# EAGLE board NyanTimer-v7 (EAGLE 9.4.2)
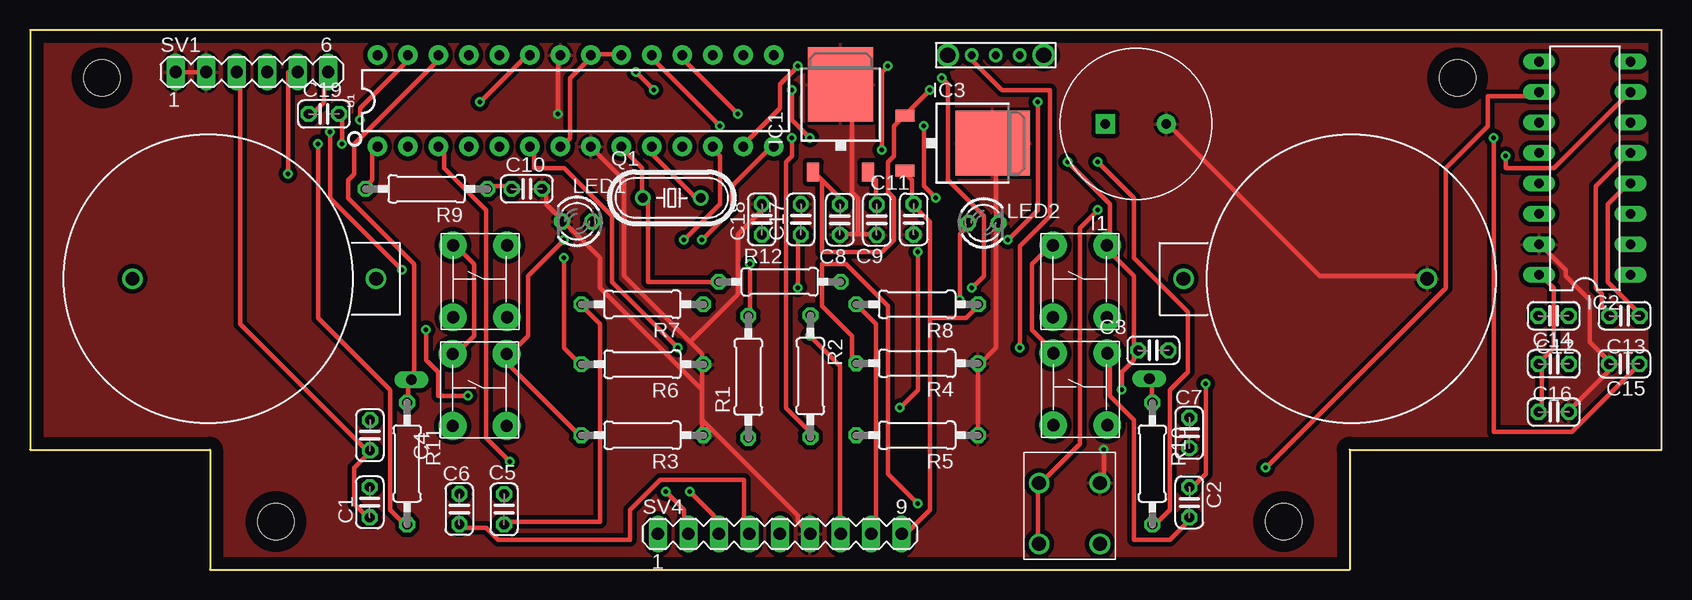
[diagram p0: board, top side]
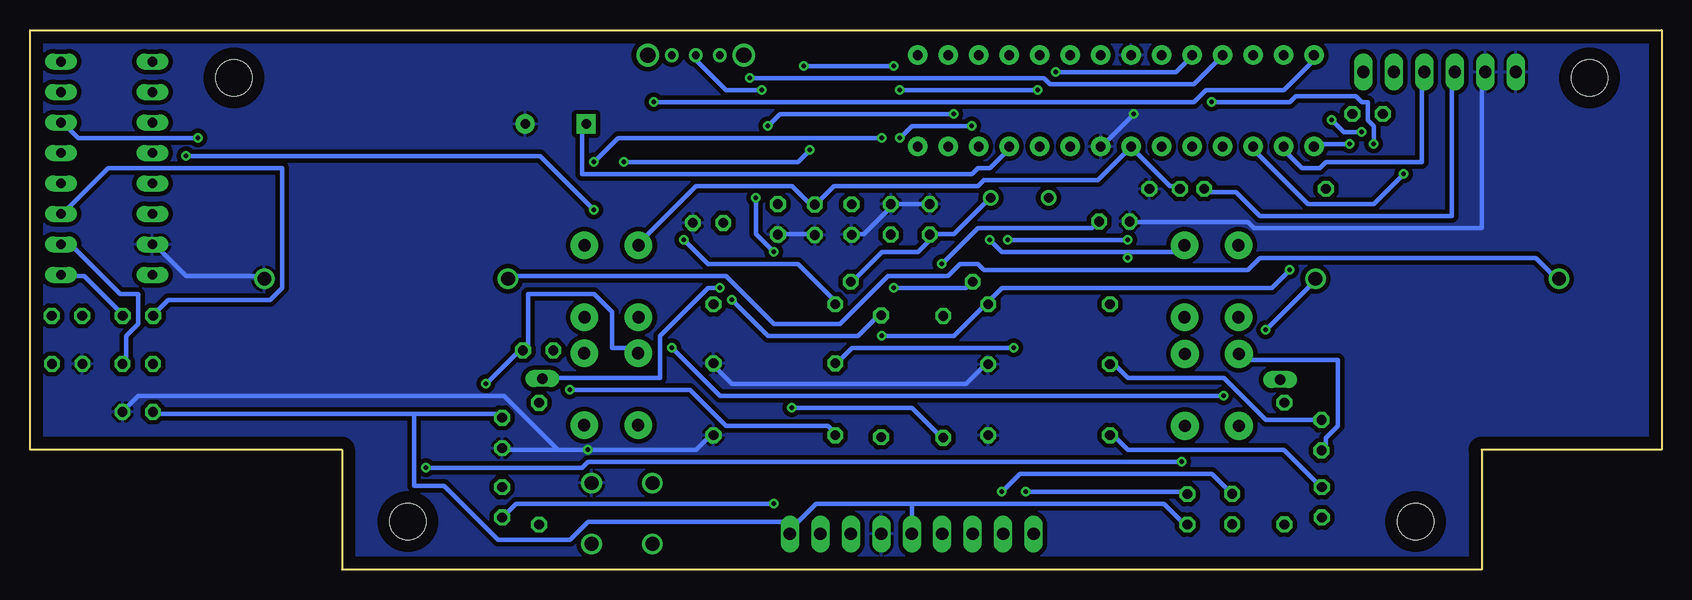
[diagram p1: board, bottom side, seen from below]

Size 136 x 45 mm. Coordinates in mm from the lower left corner, seen from the top.
Outline: 136,10 136,45 0,45 0,10 15,10 15,0 110,0 110,10 136,10
Copper layers (1*16): Top 0.035mm / dielectric 1.5mm / Bottom 0.035mm
Design rules "default": minimum track width 6mil, minimum drill 0.35mm, track to track 6mil, track to pad 6mil, pad to pad 6mil, via to via 6mil, smd to smd 6mil, copper to edge 40mil, drill to drill 6mil, minimum pad ring 10mil, minimum via ring 8mil, stop-mask expansion 4mil, vias tented up to drill 0mil, thermal gap 10mil
Net classes: 0 default: width 0.381 mm, clearance 0.381 mm
Holes 3 mm at 20.5,4 6,41 104.5,4 119,41

## Footprints (pad centres in the part's own frame; a part is rotated, then mirrored left to right if it is on the bottom)
AKIZUKI_CR2032 = drill 1.143: MINUS 0,20.32; PLUS 0,0
C025-024X044 = drill 0.813 octagon: 1 -1.27,0; 2 1.27,0
TACT_SWITCH = drill 1.016 pad 2.3: 1 0,0; 2 4.5,0; 3 0,6; 4 4.5,6
PKM13EPYH4000 = drill 0.8 pad 1.6 square: 1 0,0 | drill 0.8 pad 1.6: 2 5.08,0
TO252 = smd 1 x 1.6: 1 -2.28,-4.8; 2 2.28,-4.8 | smd 5.4 x 6.2: 3 0,2.5
DIL16 = drill 0.813 long: 1 -8.89,-3.81; 2 -6.35,-3.81; 3 -3.81,-3.81; 4 -1.27,-3.81; 5 1.27,-3.81; 6 3.81,-3.81; 7 6.35,-3.81; 8 8.89,-3.81; 9 8.89,3.81; 10 6.35,3.81; 11 3.81,3.81; 12 1.27,3.81; 13 -1.27,3.81; 14 -3.81,3.81; 15 -6.35,3.81; 16 -8.89,3.81
LED3MM = drill 0.813 octagon: A -1.27,0; K 1.27,0
PHONE = drill 1.143: GND 0,-5.08; PIN1 5.08,-5.08; PIN2 0,0; PIN3 5.08,0
1PINHEAD = drill 0.9 long: P$1 0,0
HC49/S = drill 0.813: 1 -2.413,0; 2 2.413,0
0207/10 = drill 0.813 octagon: 1 -5.08,0; 2 5.08,0
MA06-1 = drill 1.016 long: 1 -6.35,0; 2 -3.81,0; 3 -1.27,0; 4 1.27,0; 5 3.81,0; 6 6.35,0
MA09-1 = drill 1.016 long: 1 -10.16,0; 2 -7.62,0; 3 -5.08,0; 4 -2.54,0; 5 0,0; 6 2.54,0; 7 5.08,0; 8 7.62,0; 9 10.16,0
AKIZUKI_SWITCH = drill 0.65: PIN1 2,0; PIN2 4,0; PIN3 6,0 | drill 1.27: SIDE1 0,0; SIDE2 8,0
DIP28 = drill 0.813 pad 1.626: 1 -16.51,-3.81; 2 -13.97,-3.81; 3 -11.43,-3.81; 4 -8.89,-3.81; 5 -6.35,-3.81; 6 -3.81,-3.81; 7 -1.27,-3.81; 8 1.27,-3.81; 9 3.81,-3.81; 10 6.35,-3.81; 11 8.89,-3.81; 12 11.43,-3.81; 13 13.97,-3.81; 14 16.51,-3.81; 15 16.51,3.81; 16 13.97,3.81; 17 11.43,3.81; 18 8.89,3.81; 19 6.35,3.81; 20 3.81,3.81; 21 1.27,3.81; 22 -1.27,3.81; 23 -3.81,3.81; 24 -6.35,3.81; 25 -8.89,3.81; 26 -11.43,3.81; 27 -13.97,3.81; 28 -16.51,3.81

## Placement (x,y rotation side)
BT1  AKIZUKI_CR2032  [AKIZUKI_CR2032]  28.85,24.25 90 top
BT2  AKIZUKI_CR2032  [AKIZUKI_CR2032]  96.15,24.25 270 top
C1  0.1u  [C025-024X044]  28.32,5.61 90 top
C2  0.1u  [C025-024X044]  96.64,5.61 270 top
C3  0.1u  [C025-024X044]  93.64,18.28 180 top
C4  0.1u  [C025-024X044]  28.34,11.2 90 top
C5  1u  [C025-024X044]  39.52,5.02 90 top
C6  1u  [C025-024X044]  35.79,5.04 90 top
C7  0.1u  [C025-024X044]  96.64,11.39 90 top
C8  0.1u  [C025-024X044]  67.51,29.19 270 top
C9  2.2u  [C025-024X044]  70.58,29.17 270 top
C10  0.1u  [C025-024X044]  41.41,31.75 0 top
C11  2.2u  [C025-024X044]  73.66,29.21 270 top
C12  0.1u  [C025-024X044]  127,21.16 180 top
C13  0.1u  [C025-024X044]  132.92,21.16 180 top
C14  0.1u  [C025-024X044]  127.02,17.15 0 top
C15  0.1u  [C025-024X044]  132.9,17.15 180 top
C16  0.1u  [C025-024X044]  127.02,13.14 0 top
C17  22p  [C025-024X044]  64.25,29.2 90 top
C18  22p  [C025-024X044]  61,29.2 90 top
C19  0.1u  [C025-024X044]  24.5,38 0 top
CONNECTOR1  TACT_SWITCH  [TACT_SWITCH]  35.23,11.98 0 top
CONNECTOR2  TACT_SWITCH  [TACT_SWITCH]  85.3,12.04 0 top
CONNECTOR3  TACT_SWITCH  [TACT_SWITCH]  85.28,21.04 0 top
CONNECTOR4  TACT_SWITCH  [TACT_SWITCH]  35.26,21.04 0 top
I1  P-04118_PKM13EPYH4000  [PKM13EPYH4000]  89.64,37.16 0 top
IC1  7815DT  [TO252]  67.57,37.95 0 top
IC2  MAX232  [DIL16]  129.61,33.47 90 top
IC3  7815DT  [TO252]  77.74,35.56 270 top
LED1  [LED3MM]  45.6,29.03 180 top
LED2  [LED3MM]  79.48,28.91 0 top
PHN1  PHONE  [PHONE]  89.19,2.14 180 top
PIN1  1PINHEAD  [1PINHEAD]  31.8,15.84 0 top
PIN2  1PINHEAD  [1PINHEAD]  93.3,15.92 0 top
Q1  [HC49/S]  53.5,31 0 top
R1  220  [0207/10]  59.88,16.07 90 top
R2  220  [0207/10]  65.05,16.12 90 top
R3  10k  [0207/10]  51.05,11.2 180 top
R4  10k  [0207/10]  73.95,17.2 180 top
R5  10k  [0207/10]  73.95,11.2 180 top
R6  10k  [0207/10]  51.05,17.12 180 top
R7  10k  [0207/10]  51.05,22.12 0 top
R8  10k  [0207/10]  73.95,22.12 180 top
R9  10k  [0207/10]  33.05,31.75 180 top
R10  10M  [0207/10]  93.56,8.83 270 top
R11  10M  [0207/10]  31.44,8.84 270 top
R12  1M  [0207/10]  62.5,24 0 top
SV1  [MA06-1]  18.5,41.5 0 top
SV4  [MA09-1]  62.5,2.97 0 top
SW1  AKIZUKI_SWITCH  [AKIZUKI_SWITCH]  76.5,42.9 0 top
U1  328P  [DIP28]  45.48,39.09 0 top

## Library data of the parts
BT1 BT2 = akizuki_cr2032
C1-C19 = rcl; SPICEPREFIX: C
CONNECTOR1-CONNECTOR4 = akizuki_tact_switch
I1 = Akizuki
IC1 IC3 = linear
IC2 = maxim; MF: MAXIM; MPN: MAX232ACPE+; OC_FARNELL: 9723773; OC_NEWARK: 68K4544
LED1 LED2 = led
PHN1 = akizuki_phone_jack
PIN1 PIN2 = 1pinhead
Q1 = crystal; OC_FARNELL: 1667008; OC_NEWARK: unknown
R1-R12 = resistor
SV1 SV4 = con-lstb; OC_FARNELL: unknown; OC_NEWARK: unknown
SW1 = akizuki_switch
U1 = SparkFun-IC-Microcontroller; PROD_ID: IC-09136

## Nets
+5V: C1.1 C2.1 C3.1 C4.1 C9.1 C10.1 CONNECTOR1.3 CONNECTOR2.3 CONNECTOR3.3 CONNECTOR4.3 IC1.2 R9.1 SV1.3 U1.7 U1.20 U1.21
BUZ+: I1.1 U1.11
GND: BT2.MINUS C7.1 C8.2 C9.2 C10.2 C11.2 C15.2 C16.2 C17.2 C18.2 I1.2 IC1.3 IC2.15 IC3.3 LED1.K LED2.K PHN1.GND R3.1 R4.1 R5.1 R6.1 SV1.1 SV1.2 SV4.6 U1.8 U1.22
LEDG: R2.1 U1.19
LEDR: R1.1 U1.18
N$1: LED1.A R1.2
N$2: LED2.A R2.2
N$3: C5.2 SV4.2
N$4: C6.1 SV4.4
N$5: C6.2 SV4.3
N$6: C19.1 SV1.6
N$7: BT1.MINUS BT2.PLUS
N$9: C12.2 IC2.3
N$10: C12.1 IC2.1
N$11: C13.1 IC2.4
N$12: C13.2 IC2.5
N$13: C14.2 IC2.2
N$14: C15.1 IC2.6
PADL: PIN1.P$1 R11.1 U1.26
PADLIN: R11.2 U1.23
PADR: PIN2.P$1 R10.1 U1.25
PADRIN: R10.2 U1.24
PHONE: IC2.7 PHN1.PIN1 PHN1.PIN3
RESET: C19.2 R9.2 U1.1
RX: SV1.4 U1.2
S1: C17.1 Q1.1 R12.1 U1.9
S3: C18.1 Q1.2 R12.2 U1.10
SCL: R8.2 SV4.8 U1.28
SDA: R7.2 SV4.7 U1.27
SW1: C1.2 CONNECTOR1.4 R3.2 U1.12
SW2: C2.2 CONNECTOR2.4 R4.2 U1.6
SW3: C3.2 CONNECTOR3.4 R5.2 U1.13
SW4: C4.2 CONNECTOR4.4 R6.2 U1.14
T2IN: IC2.10 SV1.5 U1.3
VCC: C5.1 C7.2 C11.1 C14.1 C16.1 IC2.16 IC3.2 R7.1 R8.1 SV4.5 SV4.9
VSW: BT1.PLUS SW1.PIN1
VSWOUT: C8.1 IC1.1 IC3.1 SW1.PIN2

## Tracks (layer width: path | path; a pad name or v marks a point on that pad's centre or on a via)
+5V  (via drill 0.35)
  Top 0.381: IC1.2 70.5,32.5 70.5,30.5 C9.1 | v98,15.5 98,8 97,7 C2.1 | CONNECTOR3.3 85,27 83.5,25.5 83.5,20 85,18.5 CONNECTOR2.3 | C1.1 28,4.5 27,5.5 27,8.5 28,9.5 C4.1 28,10 17.5,20.5 17.5,41.5 SV1.3 | CONNECTOR4.3 35.5,27 37,25.5 37,19.5 35.5,18 CONNECTOR1.3 | U1.20 49,43 47,43 U1.21 46.5,42.5 45,41 45,36 44.5,35.5 U1.7 | R9.1 38.5,32 40,32 C10.1
  Bottom 0.381: CONNECTOR3.3 85,27.5 80.5,32 72.5,32 71,30.5 C9.1 70.5,30.5 69,32 57,32 56.5,32.5 47,32.5 44.5,35 U1.7 44,35 41,32 40.5,32 C10.1 | CONNECTOR2.3 85.5,18.5 87.5,18.5 87.5,21.5 89,23 94.5,23 94.5,18.5 C3.1 95,18 95.5,18 v98,15.5 | C4.1 28,10 28,11 27,12 27,17.5 35,17.5 CONNECTOR1.3 | SV1.3 17.5,41.5 17.5,29.5 33.5,29.5 35.5,31.5 38,31.5 R9.1
BUZ+
  Bottom 0.381: I1.1 90,37 90,33 57.5,33 57,33.5 56,33.5 54.5,35 U1.11
GND  (via drill 0.35)
  Top 0.381: C16.2 128.5,13.5 131.5,16.5 131.5,17 C15.2 131.5,17.5 130,19 130,22.5 128,24.5 128,25 126,27 IC2.15 | I1.2 95,37 107.5,24.5 116,24.5 BT2.MINUS | IC3.3 80.5,35.5 80.5,29 LED2.K 80.5,28.5 80.5,18.5 79.5,17.5 R4.1 79,17 79,11.5 R5.1 | v89.5,10 89.5,7.5 PHN1.GND | SV1.2 SV1.1 | C10.2 43,31.5 43,30.5 44,29.5 LED1.K 44.5,29 47.5,26 47.5,23.5 56,15 | 69,28 70.5,28 C9.2 | 69,28 68,28 C8.2 | 69,28 69,31 68.5,31.5 68.5,39.5 68,40 IC1.3 | 56,15 56,17 R6.1 56,17.5 56,18 55,19 | 56,15 56,12.5 | 56,12.5 56,11.5 R3.1 | 56,12.5 64,4.5 64,4 65,3 SV4.6 | 55,19 49.5,24.5 49.5,32.5 47,35 U1.8 | v44,38 44,42.5 U1.22 | 55,19 59,23 59,28 61,30 C18.2
  Bottom 0.381: IC2.15 125.5,27 123,24.5 116.5,24.5 BT2.MINUS | 92,10 v89.5,10 80.5,10 79.5,11 R5.1 | 92,10 96.5,10 C7.1 | SV1.2 15,41.5 15,28.5 34,28.5 34.5,29 44,29 LED1.K | C18.2 61,30.5 64,30.5 C17.2 64.5,30 66.5,28 67.5,28 C8.2 | C11.2 73.5,28 71,28 C9.2 | v44,38 46.5,35.5 U1.8 | R4.1 79,17 77.5,15.5 58,15.5 56.5,17 R6.1 | 92,10 96.5,14.5 127,14.5 128,13.5 C16.2
  pour Top: -2.5,50 137.5,50 137.5,0 -2.5,0
  pour Bottom: -2.5,55 137.5,55 137.5,0 -2.5,0
LEDG  (via drill 0.35)
  Top 0.381: v63.5,36 63.5,34.5 63,34 63,13.5 65,11.5 R2.1 | v57.5,37 52,42.5 U1.19
  Bottom 0.381: v63.5,36 62.5,37 v57.5,37
LEDR  (via drill 0.35)
  Top 0.381: v72.5,13.5 74,15 v74,26.5 | v75.5,31 74.5,32 v74.5,37 | v59,38 54.5,42.5 U1.18
  Bottom 0.381: v72.5,13.5 62.5,13.5 60,11 R1.1 | v74,26.5 75.5,28 v75.5,31 | v74.5,37 73.5,38 v59,38
N$1  (via drill 0.35)
  Top 0.381: v60,25.5 60,21.5 R1.2
  Bottom 0.381: v60,25.5 57,28.5 47.5,28.5 47,29 LED1.A
N$2  (via drill 0.35)
  Top 0.381: v77.5,22.5 77.5,28 78,28.5 LED2.A
  Bottom 0.381: v77.5,22.5 74.5,19.5 67,19.5 65.5,21 R2.2
N$3  (via drill 0.35)
  Top 0.381: v53,6.5 54.5,5 54.5,3 SV4.2
  Bottom 0.381: v53,6.5 40,6.5 C5.2
N$4
  Top 0.381: C6.1 36,3.5 38,3.5 39,2.5 50,2.5 50,5 52.5,7.5 59.5,7.5 59.5,3 SV4.4
N$5  (via drill 0.35)
  Top 0.381: v55,6.5 57,4.5 57,3 SV4.3
  Bottom 0.381: v55,6.5 53.5,8 37.5,8 36,6.5 C6.2
N$6
  Top 0.381: C19.1 23.5,38 24.5,39 24.5,41.5 SV1.6
N$7
  Bottom 0.381: BT1.MINUS 9,24.5 10.5,26 33.5,26 34.5,25 56.5,25 57,25.5 58.5,25.5 59.5,24.5 64.5,24.5 68.5,20.5 74,20.5 78,24.5 96,24.5 BT2.PLUS
N$9
  Bottom 0.381: C12.2 125.5,21.5 124.5,22.5 116,22.5 115,23.5 115,33.5 129.5,33.5 133,30 IC2.3
N$10
  Bottom 0.381: C12.1 128.5,21.5 131.5,24.5 133,24.5 IC2.1
N$11
  Top 0.381: C13.1 134,21.5 131.5,24 131.5,30.5 133,32 IC2.4
N$12
  Top 0.381: C13.2 131.5,21.5 131,22 131,23 130.5,23.5 130.5,32 133,34.5 IC2.5
N$13
  Bottom 0.381: C14.2 128,17.5 128,19.5 127,20.5 127,23 128.5,23 132.5,27 133,27 IC2.2
N$14  (via drill 0.35)
  Top 0.381: v122,36 122,11.5 128.5,11.5 134,17 C15.1
  Bottom 0.381: v122,36 132,36 133,37 IC2.6
PADL
  Top 0.381: R11.1 31.5,14 31.5,15.5 PIN1.P$1 32,16 32,25.5 26.5,31 26.5,32.5 27,33 27,35.5 34,42.5 U1.26
PADLIN  (via drill 0.35)
  Top 0.381: v24,35.5 24,21 30,15 30,5 31,4 R11.2 | v37.5,39 41.5,43 U1.23
  Bottom 0.381: v24,35.5 24,37 24.5,37.5 24.5,39 25,39 25.5,39.5 30.5,39.5 31,39 v37.5,39
PADR  (via drill 0.35)
  Top 0.381: R10.1 93.5,14 93.5,15.5 PIN2.P$1 | v76,41 76.5,40.5 76.5,32.5 79.5,29.5 79.5,24.5 v78.5,23.5
  Bottom 0.381: v76,41 51.5,41 51,40.5 39,40.5 37,42.5 U1.25 | v78.5,23.5 79.5,23.5 83.5,19.5 83.5,16 93,16 PIN2.P$1
PADRIN  (via drill 0.35)
  Top 0.381: v89,34 92,31 92,26 96.5,21.5 96.5,16.5 95,15 95,5 94,4 R10.2 | v65,36 63.5,37.5 v63.5,40 | v50.5,41.5 v52,40
  Bottom 0.381: v89,34 87,36 v65,36 | v52,40 v63.5,40 | v50.5,41.5 40.5,41.5 39.5,42.5 U1.24
PHONE  (via drill 0.35)
  Top 0.381: v123,34.5 123,33.5 127,33.5 133,39.5 IC2.7 | v89,30 87.5,28.5 87.5,10.5 84.5,7.5 PHN1.PIN1 84,7 84,2.5 PHN1.PIN3
  Bottom 0.381: v123,34.5 93.5,34.5 v89,30
RESET  (via drill 0.35)
  Top 0.381: v26,35.5 26,38 C19.2 | R9.2 28,32 28.5,32.5 28.5,35 U1.1
  Bottom 0.381: v26,35.5 28.5,35.5 U1.1
RX
  Bottom 0.381: SV1.4 20,41.5 20,34 28,34 28.5,33.5 30,33.5 31.5,35 U1.2
S1  (via drill 0.35)
  Top 0.381: R12.1 51.5,24 51.5,31 Q1.1 51,31 51,33.5 49.5,35 U1.9 | v64,23.5 64,27.5 C17.1
  Bottom 0.381: v64,23.5 58,23.5 57.5,24 R12.1
S3
  Top 0.381: Q1.2 55.5,31 52,34.5 52,35 U1.10
  Bottom 0.381: R12.2 67.5,24 65,26.5 62,26.5 61,27.5 C18.1 61,28 59,28 56,31 Q1.2
SCL  (via drill 0.35)
  Top 0.381: R8.2 69,22 70.5,20.5 70.5,3 SV4.8 | v84,39 84,30 v81.5,27.5
  Bottom 0.381: v84,39 39,39 38,40 31.5,40 29,42.5 U1.28 | v81.5,27.5 79.5,25.5 72,25.5 69,22.5 R8.2
SDA  (via drill 0.35)
  Top 0.381: v65,19.5 67.5,17 67.5,3 SV4.7 | v27.5,37.5 27.5,38.5 31.5,42.5 U1.27 | v25,36.5 25,31 v31,25
  Bottom 0.381: v65,19.5 59,19.5 56.5,22 R7.2 56,22.5 55,23.5 32.5,23.5 v31,25 | v27.5,37.5 26.5,36.5 v25,36.5
SW1  (via drill 0.35)
  Top 0.381: v54.5,27.5 57.5,30.5 57.5,34.5 57,35 U1.12 | v44.5,27.5 41.5,24.5 41.5,19.5 40,18 CONNECTOR1.4 40,17.5 40,17 45.5,11.5 R3.2
  Bottom 0.381: C1.2 28.5,7 31.5,10 44.5,10 45.5,11 R3.2 | v44.5,27.5 v54.5,27.5
SW2  (via drill 0.35)
  Top 0.381: C2.2 96.5,4 95,2.5 92,2.5 92,12.5 90,14.5 90,18 CONNECTOR2.4 | v54,18.5 48.5,24 48.5,29.5 44.5,33.5 42,33.5 42,35 U1.6 | v74,5.5 71.5,8 71.5,22 68,25.5 66,25.5 66,22 68.5,19.5 68.5,17.5 R4.2
  Bottom 0.381: v54,18.5 67.5,18.5 68.5,17.5 R4.2 | v74,5.5 95.5,5.5 96.5,4.5 C2.2
SW3  (via drill 0.35)
  Top 0.381: v91,15 91,16.5 92,17.5 92,18 C3.2 92,18.5 92,24.5 90,26.5 90,27 CONNECTOR3.4 90,27.5 90,30.5 v86.5,34 | v64,42 62.5,40.5 62.5,38.5 59.5,35.5 U1.13 | v71.5,42 71,41.5 v71,35
  Bottom 0.381: v91,15 81,15 78,12 69.5,12 69,11.5 R5.2 | v71.5,42 v64,42 | v71,35 72,34 v86.5,34
SW4  (via drill 0.35)
  Top 0.381: v56,27.5 58.5,30 58.5,32 61.5,35 U1.14 | v44.5,26 44.5,18.5 45.5,17.5 R6.2
  Bottom 0.381: C4.2 28.5,12.5 33,12.5 36.5,16 44.5,16 45.5,17 R6.2 | v56,27.5 55,26.5 44.5,26.5 | 44.5,26.5 40.5,26.5 40,27 CONNECTOR4.4 | 44.5,26.5 v44.5,26
T2IN  (via drill 0.35)
  Top 0.381: v103,8.5 118,23.5 118,33.5 121.5,37 121.5,39.5 125.5,39.5 IC2.10 | v40,9 38,11 38,30 34.5,33.5 34.5,35 U1.3 | v21.5,33 21.5,41.5 SV1.5
  Bottom 0.381: v103,8.5 90,8.5 89.5,9 v40,9 | v21.5,33 24,30.5 29.5,30.5 34,35 U1.3
VCC
  Top 0.381: C16.1 126,13.5 126,17 C14.1 126,17.5 127,18.5 127,23.5 126,24.5 IC2.16 | C5.1 40,4 47.5,4 47.5,20.5 46,22 R7.1 | IC3.2 73,33 73.5,32.5 73.5,30.5 C11.1 74,30 75,29 75,21 | 75,21 78,21 79,22 R8.1 | 75,21 75,5 73,3 SV4.9
  Bottom 0.381: 104,13 125.5,13 C16.1 | 104,13 97,13 C7.2 | 62.5,5.5 SV4.5 | 62.5,5.5 70.5,5.5 72,4 | 72,4 73,3 SV4.9 72,4 | 62.5,5.5 41.5,5.5 40,4 C5.1 | 104,13 104,7 101.5,7 97,2.5 91,2.5 89.5,4 72,4
VSW  (via drill 0.35)
  Top 0.381: v82.5,18.5 82.5,27 85,29.5 85,40 81,40 78.5,42.5 SW1.PIN1 | v36.5,14.5 34,14.5 34,16.5 33,17.5 v33,20
  Bottom 0.381: v82.5,18.5 78.5,14.5 v36.5,14.5 | v33,20 29,24 BT1.PLUS
VSWOUT  (via drill 0.35)
  Top 0.381: 66,32.5 67.5,31 67.5,30.5 C8.1 | 66,32.5 65.5,33 IC1.1 | 66,32.5 66,26.5 71,26.5 72,27.5 72,31 71.5,31.5 71.5,34 72,34.5 72,37 72.5,37.5 IC3.1 73,38 v75,40
  Bottom 0.381: v75,40 78,40 80.5,42.5 SW1.PIN2